# Altium PCB Board.PcbDoc
Units mil, origin at the board's own origin, x right, y up, seen from the top; angles counter-clockwise.
Board outline 2102.46 x 1840.52 mil, 4 copper layers (Top Layer, Layer 1, Layer 2, Bottom Layer), stack 22.441 mil thick; 45 components, 44 nets, 184 pads, 76 vias.
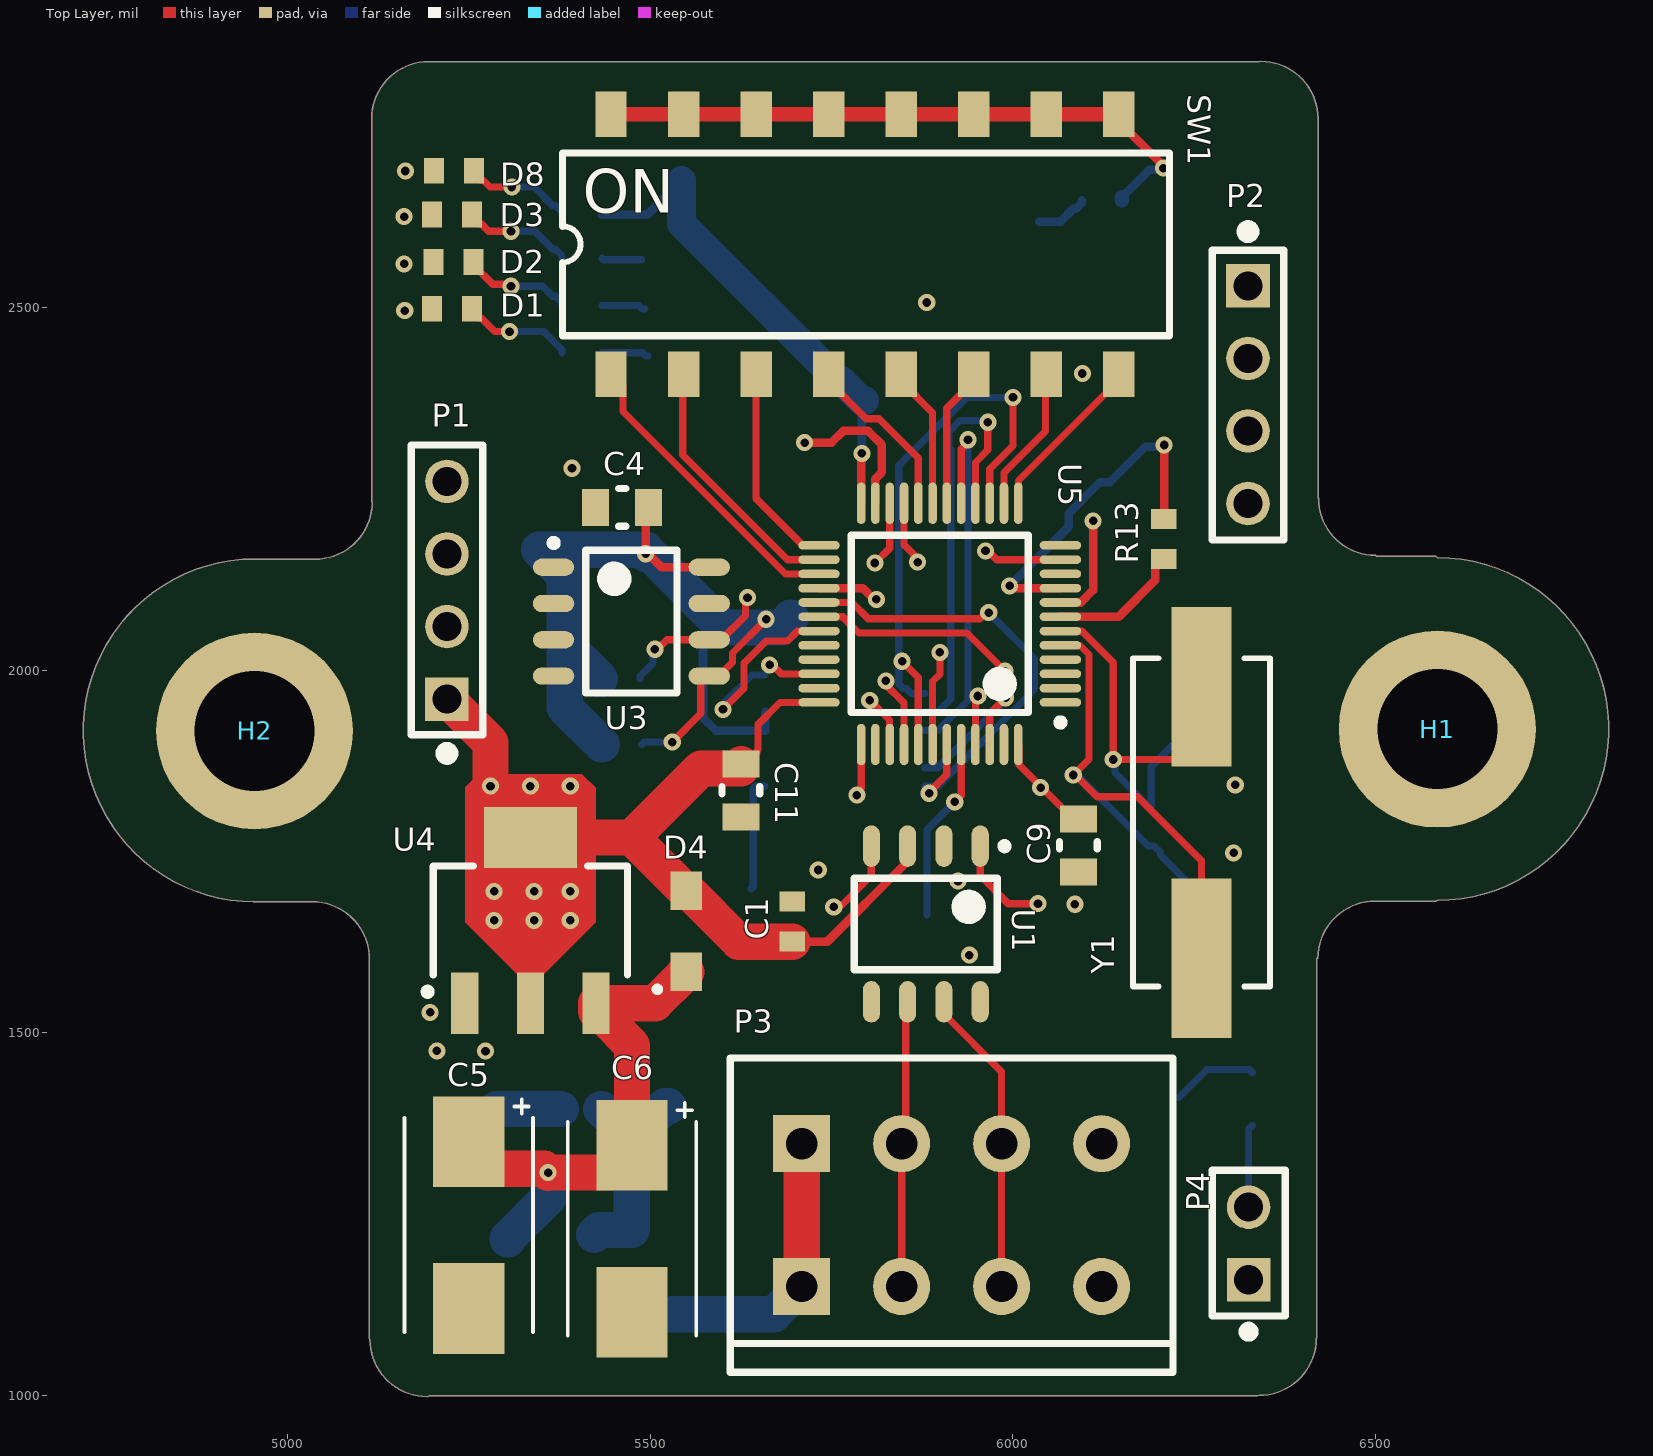
[diagram p0: Top Layer view]
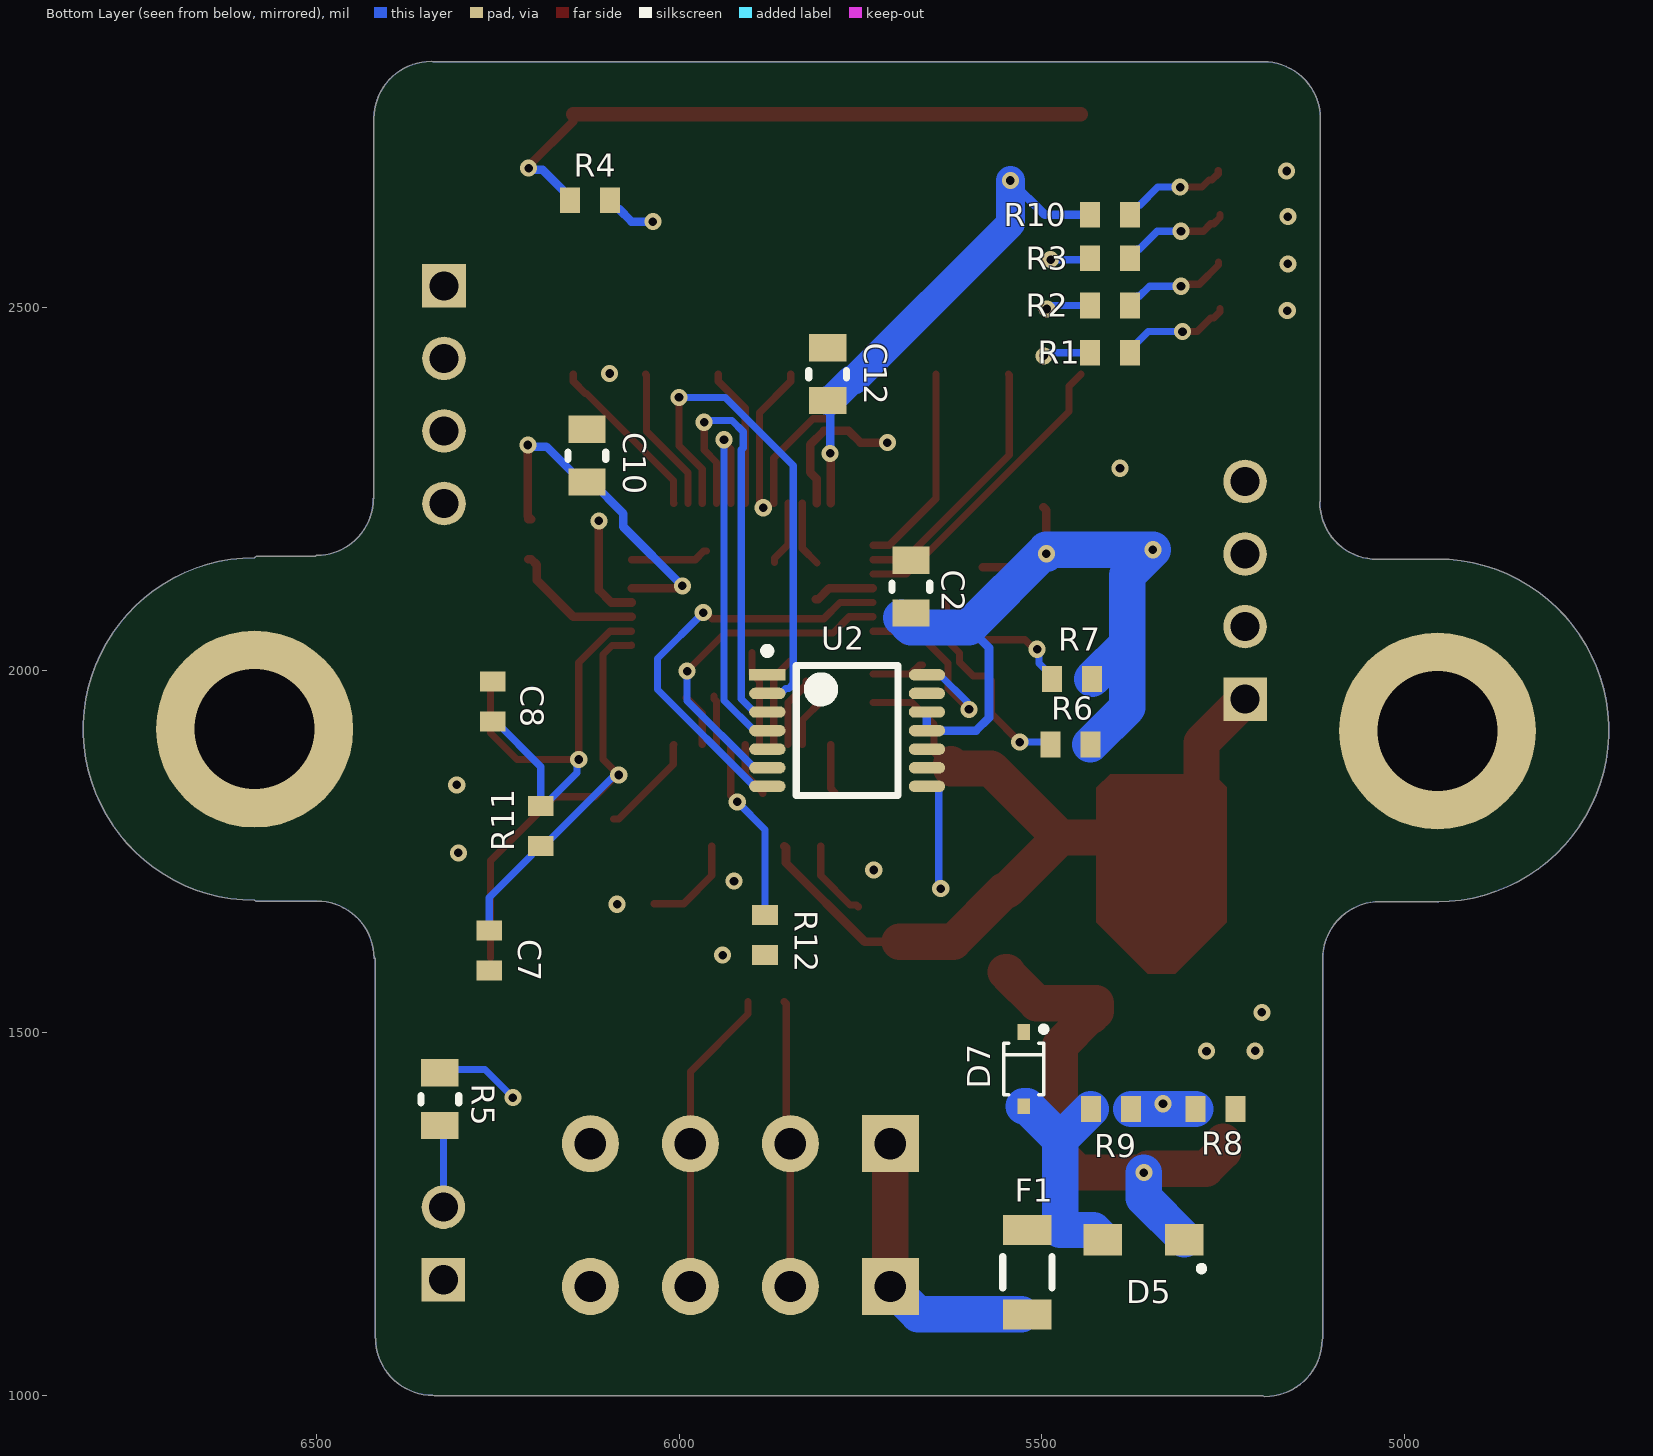
[diagram p1: Bottom Layer view, seen from below]
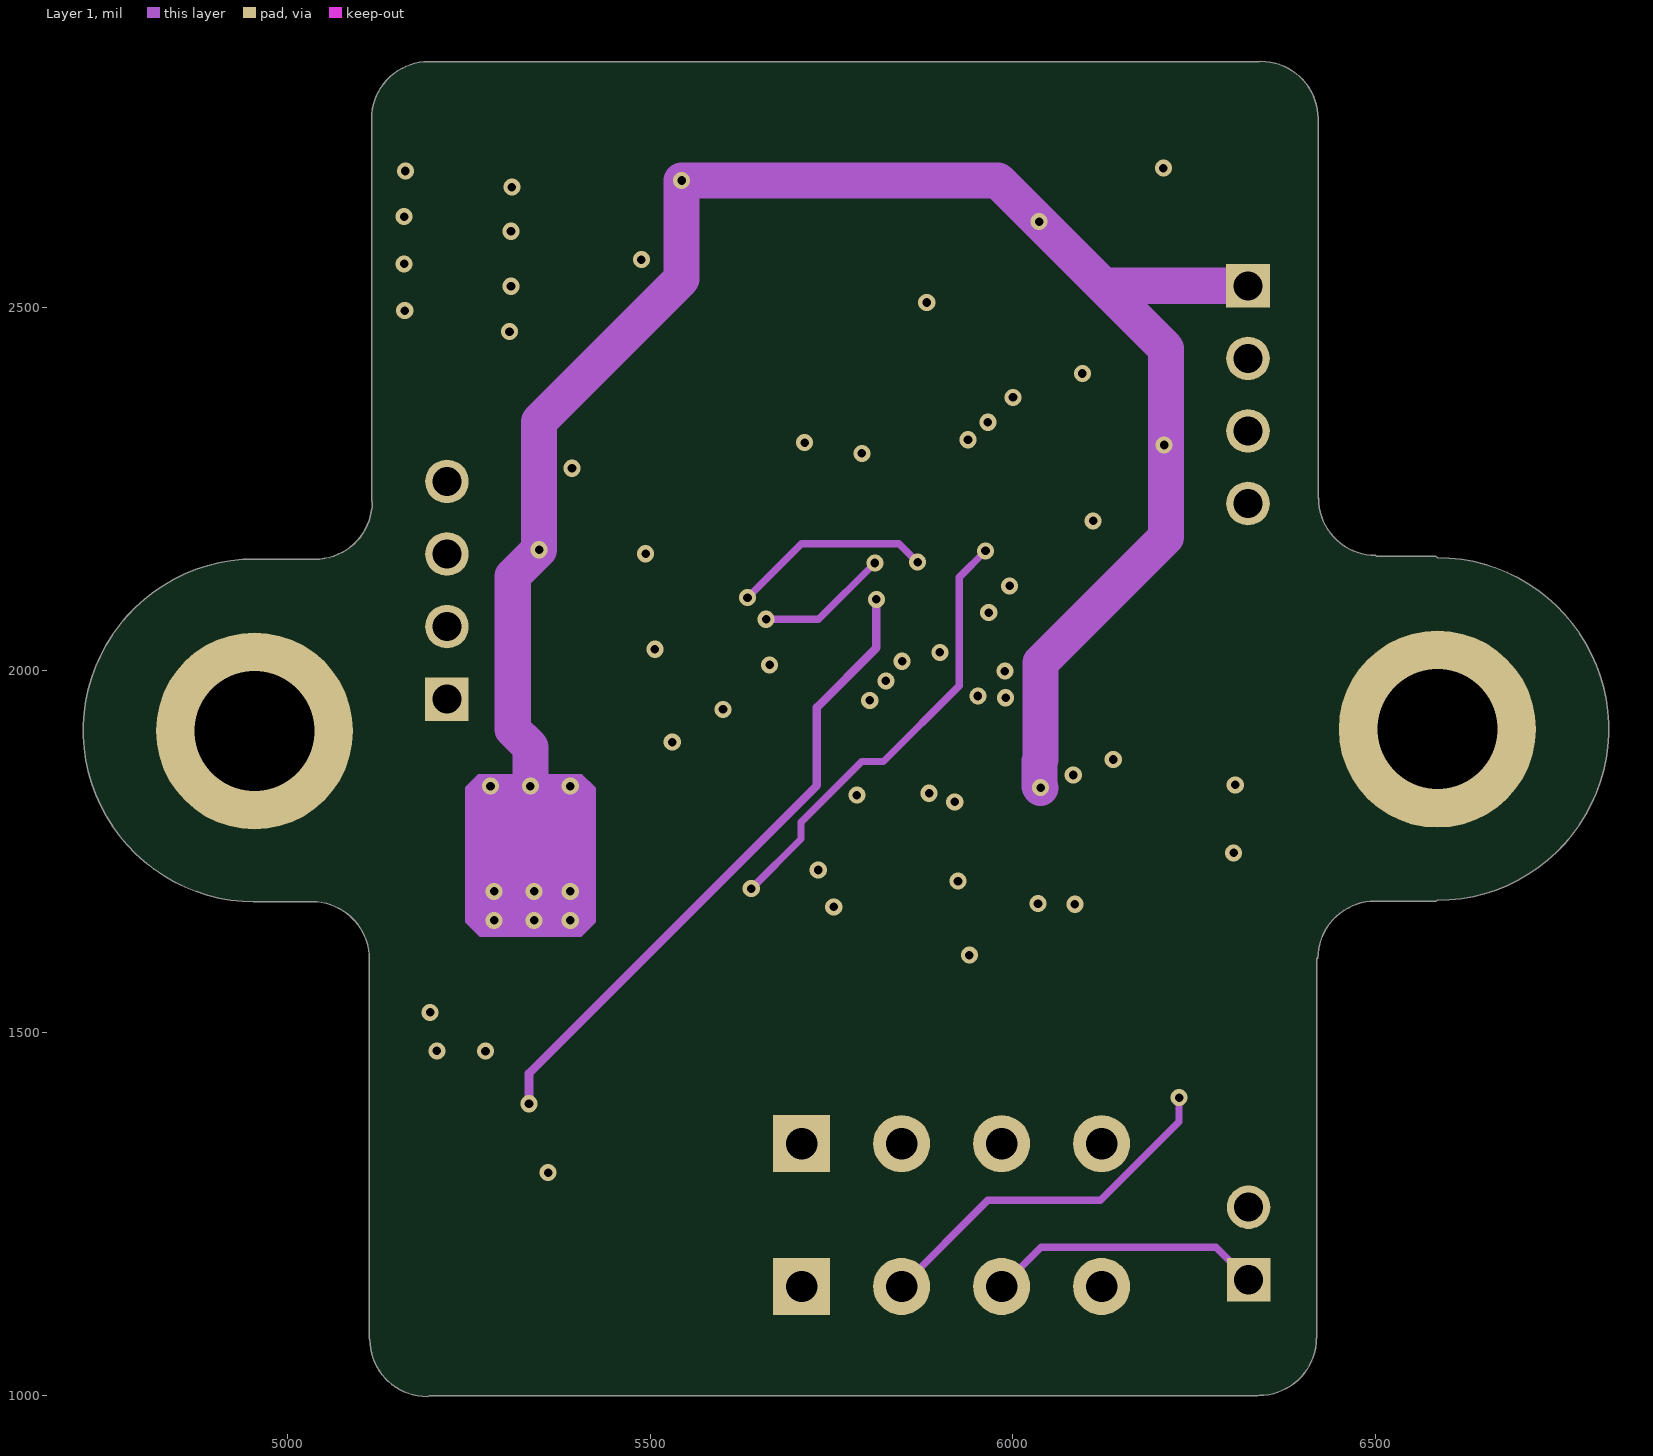
[diagram p2: Layer 1]
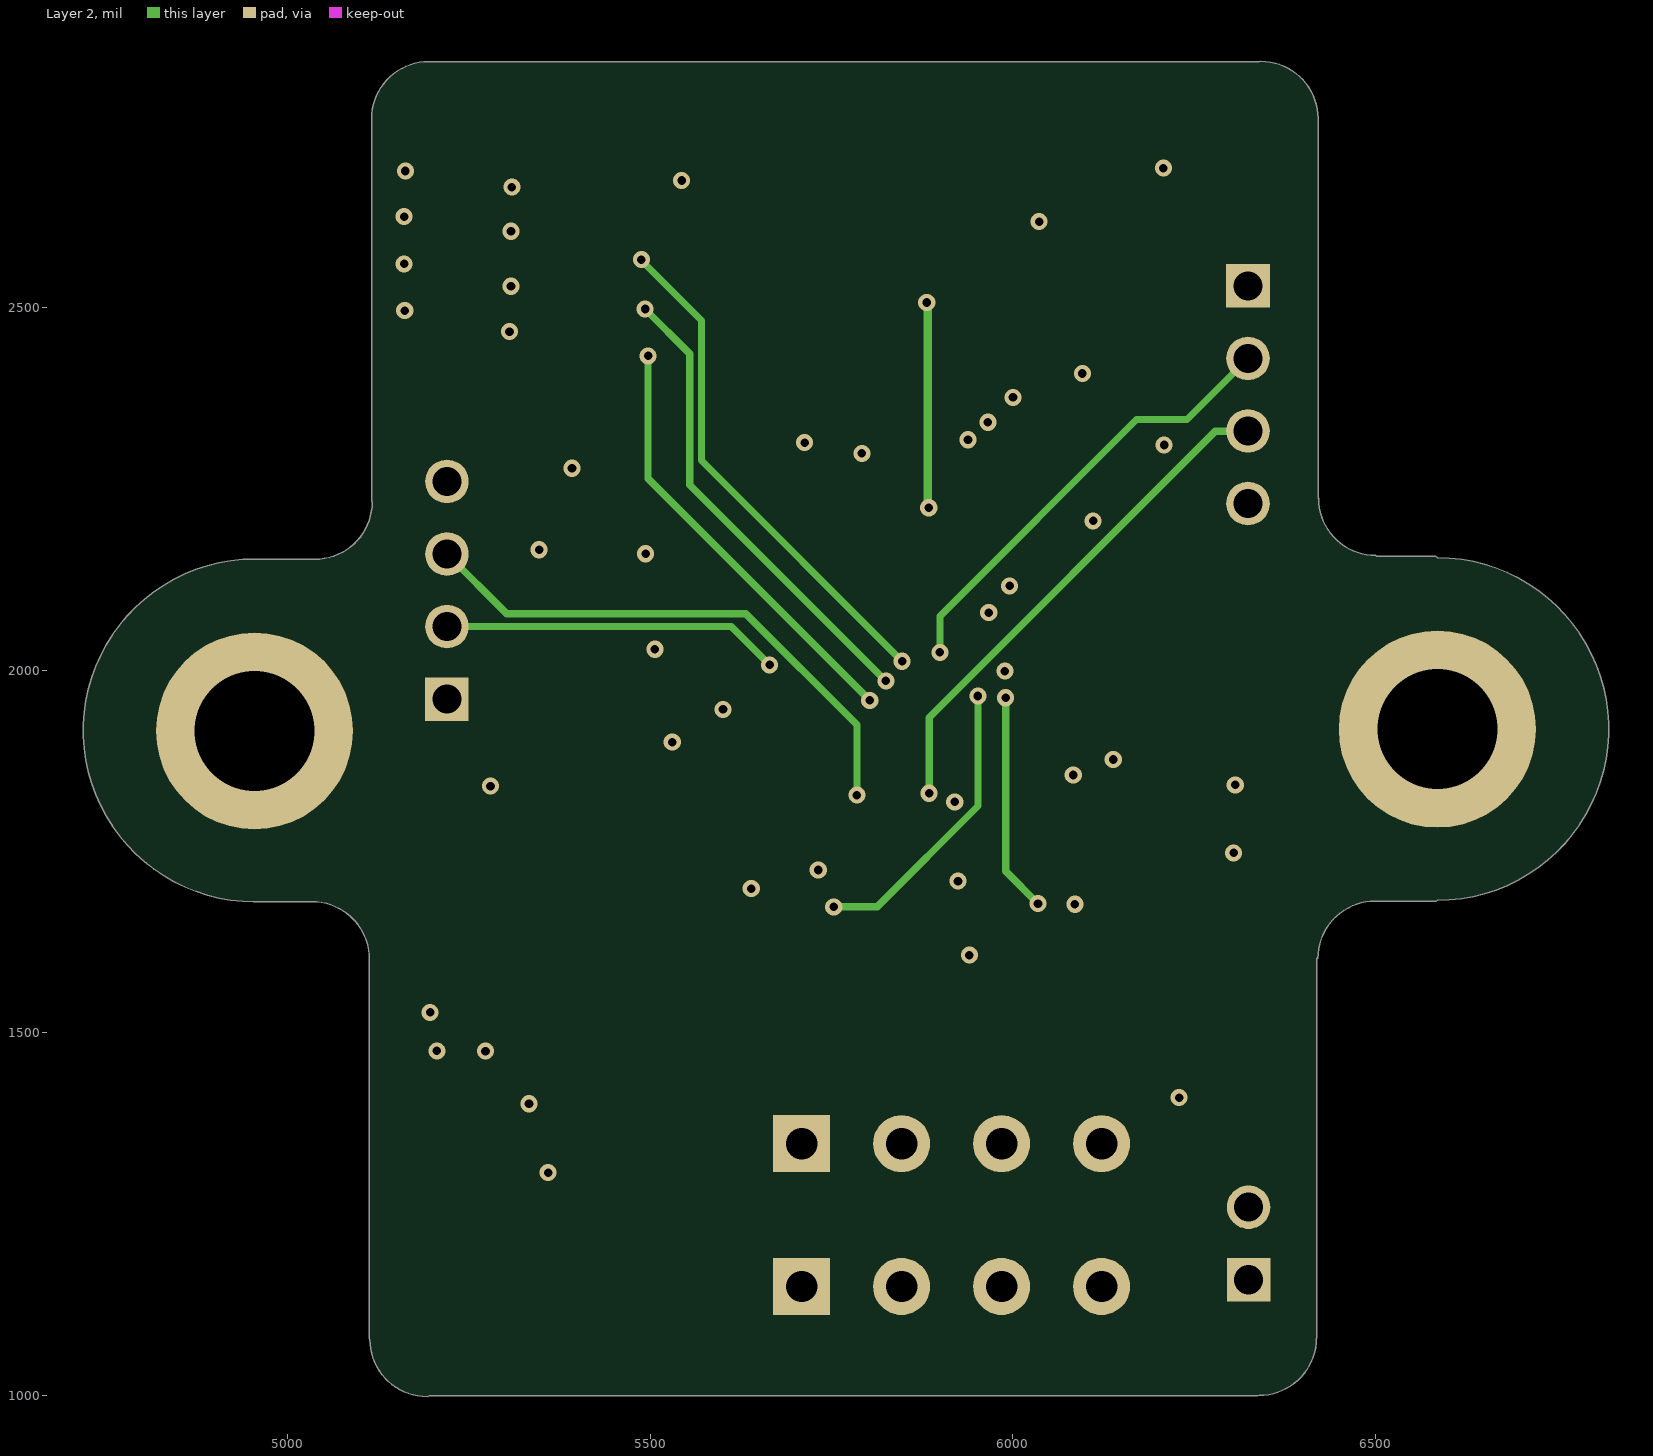
[diagram p3: Layer 2]

## Layer stack, top to bottom
Top Solder: solder mask 0.3937, Solder Resist, Dk 3.5
Top Layer: signal copper 1.4173
Dielectric 2: prepreg 2.7953, PP-006, Dk 4.1
Layer 1: signal copper 0.7087
Dielectric 1: dielectric 12.5984, FR-4, Dk 4.8
Layer 2: signal copper 0.7087
Dielectric 3: prepreg 2.7953, PP-006, Dk 4.1
Bottom Layer: signal copper 1.4173
Bottom Solder: solder mask 0.3937, Solder Resist, Dk 3.5

## Board outline
5034.15,1680.7 cw(c5034.15,1601.96) 5112.89,1601.96 5113.04,1602.04 5113.04,1078.41 5113.75,1077.28 ccw(c5192.49,1077.28) 5192.49,998.54 5195.7,1000 6337.44,1000 6339.61,1000.31 ccw(c6339.61,1079.05) 6418.35,1079.05 6419.21,1078.82 6419.21,1602.44 6420.55,1602.72 cw(c6499.29,1602.72) 6499.29,1681.46 6502.06,1681.59 6583.79,1681.59 6585.18,1682.53 ccw(c6585.18,1918.75) 6585.18,2154.97 6582.66,2157.12 6500.93,2157.12 6500.24,2158.09 cw(c6500.24,2236.83) 6421.5,2236.83 6421.1,2236.5 6421.1,2760.12 6420.68,2760.32 ccw(c6341.94,2760.32) 6341.94,2839.06 6339.45,2838.66 5197.71,2838.66 5194.85,2838.65 ccw(c5194.85,2759.91) 5116.11,2759.91 5116.53,2755.49 5116.53,2231.87 5116.92,2231.51 cw(c5038.18,2231.51) 5038.18,2152.77 5037.56,2153.05 4955.82,2153.05 4954.87,2153.03 ccw(c4954.87,1916.81) 4954.87,1680.59 4953.24,1680.93

## Design rules (kind name [scope] priority, off if disabled: settings)
BoardOutlineClearance [All] p1: gap=15.75 ignorepadtopadclearanceinfootprint=FALSE except(0: Arc-SplitContinuation Track-SplitContinuation SMDPad-SplitContinuation THPad-SplitContinuation Via-SplitContinuation Fill-SplitContinuation Poly-SplitContinuation Region-SplitContinuation Text-SplitContinuation)
Clearance [All] p1: gap=10 ignorepadtopadclearanceinfootprint=FALSE except(0: Arc-Hole Track-Hole SMDPad-Hole THPad-Hole Via-Hole Fill-Hole Poly-Hole Region-Hole Text-Hole; 5.91: Arc-Arc Arc-Track Arc-SMDPad Track-Track Track-SMDPad SMDPad-SMDPad; 9.84: Arc-THPad Arc-Via Track-THPad Track-Via SMDPad-THPad SMDPad-Via THPad-THPad THPad-Via Via-Via)
PolygonConnect [All] p1: connectstyle=Relief reliefconductorwidth=10 reliefentries=4 polygonreliefangle="90 Angle" airgapwidth=10
RoutingVias [All] p1: holewidth=28 width=50 viastyle="Through Hole" minholewidth=28 minwidth=50 maxholewidth=28 maxwidth=50
SolderMaskExpansion [All] p1: expansion=4 istentingtop=FALSE
Width [All] p1: maxlimit=3937.01 minlimit=7.87 preferedwidth=10 minimp=50.000000 maximp=50.000000 favimp=50.000000
30 further rules are at their usual default settings.

## Classes and differential pairs
component class Power: C5 C6 D4 D5 D7 D8 F1 R8 R9 R10 U4
component class MCU: C7 C8 C9 C10 C11 C12 H1 H2 R11 R12 R13 U5 Y1
component class IO: C1 D1 D2 D3 P1 P2 P3 P4 R1 R2 R3 R4 R5 SW1 U1
component class Encoder: C2 C4 R6 R7 U2 U3

## Components (designator, comment, footprint, x,y, rotation, side; value= is the part's Value field where it differs from the comment)
C1 "cap_single_np" chip_0603 5696.02,1653.21 r270 top
C2 "cap_single_np" chip_0805 5680.55,2114.93 r90 bottom
C4 "cap_single_np" chip_0805 5461.35,2224.34 r180 top
C5 "cap_single_p" chip_2917_AVX_TAJD 5250,1235 r270 top
C6 "cap_single_p" chip_2917_AVX_TAJD 5475,1230 r270 top
C7 "cap_single_np" chip_0603 6261.83,1613.42 r270 bottom
C8 "cap_single_np" chip_0603 6256.83,1956.58 r90 bottom
C9 "cap_single_np" chip_0805 6090.31,1758.31 r270 top
C10 "cap_single_np" chip_0805 6127.21,2295.51 r90 bottom
C11 "cap_single_np" chip_0805 5625.26,1834.09 r270 top
C12 "cap_single_np" chip_0805 5795.26,2407.95 r90 bottom
D1 "diode_4" chip_0603 5226.84,2498 r0 top
D2 "diode_4" chip_0603 5228.92,2562.42 r0 top
D3 "diode_4" chip_0603 5226.84,2627.89 r0 top
D4 "diode_2" sod123_0 5550,1640 r90 top
D5 "diode_2" sod123_0 5360,1215 r0 bottom
D7 "diode_5" sod323_0 5525,1450 r270 bottom
D8 "diode_4" chip_0603 5229.42,2688.16 r0 top
F1 "PTC_0" chip_1206 5520,1170 r270 bottom
H1 "mounting_hole_0" #8-32_SOCKET_HEAD 6585.23,1918.69 r0 top
H2 "mounting_hole_0" #8-32_SOCKET_HEAD 4954.69,1916.07 r0 top
P1 "conn-4x1_0" HDDR_4x1_0 5220,1960 r90 top
P2 "conn-4x1_0" HDDR_4x1_0 6324.16,2529.62 r270 top
P3 "conn-4x1_0" TERM_3.50MM_4x1_0 5708.94,1347.18 r0 top
P4 "conn-2x1_0" hddr_2x1_0 6325,1210 r90 top
R1 "res_single" chip_0603 5406,2437.53 r180 bottom
R2 "res_single" chip_0603 5406,2502.53 r180 bottom
R3 "res_single" chip_0603 5406,2567.53 r180 bottom
R4 "res_single" chip_0603 6122.68,2647.63 r180 bottom
R5 "res_single" chip_0805 6330,1408.58 r90 bottom
R6 "res_single" chip_0603 5460.79,1897.36 r0 bottom
R7 "res_single" chip_0603 5458.53,1987.58 r0 bottom
R8 "res_single" chip_0603 5260.77,1394.84 r0 bottom
R9 "res_single" chip_0603 5405,1395 r0 bottom
R10 "res_single" chip_0603 5406,2627.53 r180 bottom
R11 "res_single" chip_0603 6190.73,1785.09 r90 bottom
R12 "res_single" chip_0603 5881.71,1634.93 r270 bottom
R13 "res_single" chip_0603 6208.22,2180.58 r90 top
SW1 "DIP_SW_8" A6S-8104-H 5446.12,2411.74 r90 top
U1 "SN65HVD232" SO-8 5880,1650 r270 top
U2 "AS5147P-HTSM" TSSOP-14_0 5768.51,1916.57 r180 bottom
U3 "24AA01" SO-8 5474.24,2066.76 r0 top
U4 "LM1117" sot-223-4 5335,1655 r90 top
U5 "STM32F103C8" LQFP48_0 5899.21,2063.66 r180 top
Y1 "osc_xtal_2p_0" ABLS_AT49_OSC 6260,1790 r270 top

## Footprints (in the part's own frame and the unit in brackets; to place one, negate y for a bottom-side part, rotate by r counter-clockwise, add the part's x,y. Pads: shape width x height; smd on the part's side, far side on the other; paste and mask are expansions set on the pad)
#8-32_SOCKET_HEAD [mm] "Mounting hole for #8-32 socket head cap screw"
  round 6.9 hole 4.2: 0(0,0)
A6S-8104-H [mm]
  rect 1.6x1.1 smd: 1(-0.1,0) 2(-0.1,-2.54) 3(-0.1,-5.08) 4(-0.1,-7.62) 5(-0.1,-10.16) 6(-0.1,-12.7) 7(-0.1,-15.24) 8(-0.1,-17.78) 9(9,-17.78) 10(9,-15.24) 11(9,-12.7) 12(9,-10.16) 13(9,-7.62) 14(9,-5.08) 15(9,-2.54) 16(9,0)
  silkscreen extent 1.25,-19.55 7.65,1.7, body extent -0.45,-19.53 9.35,1.73, height 4.4
ABLS_AT49_OSC [mil] "ABLS Crystal Oscillator"
  rect 220x83 smd: 1(-187.01,0) 2(186.99,0)
  silkscreen extent -226,-94 226,94, body extent -224,-94 224,94, height 157
chip_0603 [mm]
  rect 0.7x0.9 smd: 1(-0.7,0) 2(0.7,0)
  body extent -0.85,-0.45 0.85,0.45, height 0.6
chip_0805 [mm]
  rect 0.95x1.3 smd: 1(-0.925,0) 2(0.925,0)
  silkscreen extent -0.13,-0.66 0.13,0.66, body extent -1.05,-0.65 1.05,0.65, height 0.6
chip_1206 [mm]
  rect 1.05x1.7 smd: 1(-1.475,0) 2(1.475,0)
  silkscreen extent -0.55,-0.86 0.55,0.86, body extent -1.65,-0.85 1.65,0.85, height 0.6
chip_2917_AVX_TAJD [mil] "2917 footprint for AVX TAJD"
  rect 125x98.43 smd: 1(-115,0) 2(115,0)
  silkscreen extent -173,-89 148,89, body extent -147,-88 147,89, height 124
hddr_2x1_0 [mil] "0.1\" Header 2x1"
  rect 60x60 hole 40: 1(-50.39,0)
  round 60 hole 40: 2(49.61,0)
  silkscreen extent -128,-50 100,50, body extent -100,-50 100,50, height 336
HDDR_4x1_0 [mil]
  rect 60x60 hole 40: 1(0,0)
  round 60 hole 40: 2(100,0) 3(200,0) 4(300,0)
  silkscreen extent -83,-49 350,49, body extent -50,-50 350,50, height 336
LQFP48_0 [mm] "LQFP48, 7.00x7.00mm, 0.50mm"
  oval 1.45x0.3 smd: 1(-4.225,2.75) 2(-4.225,2.25) 3(-4.225,1.75) 4(-4.225,1.25) 5(-4.225,0.75) 6(-4.225,0.25) 7(-4.225,-0.25) 8(-4.225,-0.75) 9(-4.225,-1.25) 10(-4.225,-1.75) 11(-4.225,-2.25) 12(-4.225,-2.75) 25(4.225,-2.75) 26(4.225,-2.25) 27(4.225,-1.75) 28(4.225,-1.25) 29(4.225,-0.75) 30(4.225,-0.25) 31(4.225,0.25) 32(4.225,0.75) 33(4.225,1.25) 34(4.225,1.75) 35(4.225,2.25) 36(4.225,2.75)
  oval 0.3x1.45 smd: 13(-2.75,-4.225) 14(-2.25,-4.225) 15(-1.75,-4.225) 16(-1.25,-4.225) 17(-0.75,-4.225) 18(-0.25,-4.225) 19(0.25,-4.225) 20(0.75,-4.225) 21(1.25,-4.225) 22(1.75,-4.225) 23(2.25,-4.225) 24(2.75,-4.225) 37(2.75,4.225) 38(2.25,4.225) 39(1.75,4.225) 40(1.25,4.225) 41(0.75,4.225) 42(0.25,4.225) 43(-0.25,4.225) 44(-0.75,4.225) 45(-1.25,4.225) 46(-1.75,4.225) 47(-2.25,4.225) 48(-2.75,4.225)
  silkscreen extent -4.35,-3.1 3.1,3.57, body extent -3.5,-3.5 3.5,3.5, height 1.6
SO-8 [mm] "SO-8 Package"
  oval 1.45x0.6 smd: 1(-2.725,1.905) 2(-2.725,0.635) 3(-2.725,-0.635) 4(-2.725,-1.905) 5(2.725,-1.905) 6(2.725,-0.635) 7(2.725,0.635) 8(2.725,1.905)
  silkscreen extent -2.85,-2.5 1.6,2.88, body extent -3.08,-2.5 3.08,2.5, height 2
sod123_0 [mm] "SOD123, 1.65mm x 2.70mm"
  rect 1.35x1.1 smd: 1(-1.425,0) 2(1.425,0)
  silkscreen extent -2.13,0.92 -1.93,1.12, body extent -1.45,-0.9 1.45,0.9, height 1
sod323_0 [mm] "SOD-323, 1.25mm x 1.7mm"
  rect 0.55x0.45 smd: 1(-1.3,0) 2(1.3,0)
  silkscreen extent -1.5,-0.7 0.9,0.8, body extent -0.9,-0.67 0.9,0.67, height 1
sot-223-4 [mm]
  rect 2.15x0.95 smd: 1(-2.9,2.3) 2(-2.9,0) 3(-2.9,-2.3)
  rect 2.15x3.25 smd: 4(2.9,0)
  silkscreen extent -2.62,-3.4 1.9,3.72, body extent -1.9,-3.4 1.9,3.4, height 1.1
TERM_3.50MM_4x1_0 [mm]
  rect 2x2 hole 1.1: 1(0,-5) 1(0,0)
  round 2 hole 1.1: 2(3.5,-5) 2(3.5,0) 3(7,-5) 3(7,0) 4(10.5,-5) 4(10.5,0)
  silkscreen extent -2.5,-8 13,3, body extent -2.5,-8 13,3, height 8.98
TSSOP-14_0 [mil]
  rect 50x15.75 smd mask+1.97: 1(-110,76.8)
  oval 50x15.75 smd mask+1.97: 2(-110,51.2) 3(-110,25.6) 4(-110,0) 5(-110,-25.6) 6(-110,-51.2) 7(-110,-76.8) 8(110,-76.8) 9(110,-51.2) 10(110,-25.6) 11(110,0) 12(110,25.6) 13(110,51.2) 14(110,76.8)
  Top Layer region: -28,66.8
  silkscreen extent -115,-90 70,115, body extent -126,-87 127,88, height 44

## Part data
C1: library part CAP-00477, "CAP, 0.1uF, ±10%, 100V, X7R, 0603", Capacitance=0.1uF, Manufacturer=Murata, Manufacturer PN=GRM188R72A104KA35D, Tolerance=±10%, Voltage Rating=100V, Part Number=CAP-00477, Type=X7R
C2 C4 C9 C10 C11 C12: library part CAP-00073, "CAP, 0.10uF, 10%, 100V, X7R, 0805", Capacitance=0.10uF, Manufacturer=Murata, Manufacturer PN=GRM21BR72A104KAC4L, Tolerance=10%, Voltage Rating=100V, Part Number=CAP-00073, Type=X7R
C5 C6: library part CAP-00550, "CAP, 100uF, ±10%, 16V, Tantalum, 2917", Capacitance=100uF, Manufacturer=AVX, Manufacturer PN=TAJD107K016RNJ, Tolerance=±10%, Voltage Rating=16V, Cost=$0.94, Part Number=CAP-00550, Type=Tantalum
C7 C8: library part CAP-00417, "CAP, 18pF, ±1%, 50V, C0G, 0603", Capacitance=18pF, Manufacturer=Murata, Manufacturer PN=GRM1885C1H180FA01J, Tolerance=±1%, Voltage Rating=50V, Part Number=CAP-00417, Type=C0G
D1 D2 D3: library part DIO-00049, "LED, Blue, 0603, Low current, HELI2 Series", Current Rating=30mA, Forward Voltage=2.65V, Manufacturer=Kingbright, Manufacturer PN=APT1608LVBC/D, Power Rating=120mW, Reverse Breakdown Voltage=5V, Cost=0.58, Part Number=DIO-00049, Type=LED
D4 D5: library part DIO-00001, "Dio Shtky, 1A, 0.55V, 40V, SOD-123", Current Rating=1A, Forward Voltage=550mV, Manufacturer="ON Semi", Manufacturer PN=MBR140SFT1G, Reverse Breakdown Voltage=40V, Part Number=DIO-00001, Type=Schottky
D7: library part DIO-00037, "TVS, 5V, 500W", Manufacturer=ST, Manufacturer PN=ESDA8V2-1J, Power Rating=500W, Reverse Breakdown Voltage=5V, Part Number=DIO-00037, Type=TVS
D8: library part DIO-00050, "LED, Green, 0603, Low current, HELI2 Series", Current Rating=30mA, Forward Voltage=2.65V, Manufacturer=Kingbright, Manufacturer PN=APT1608LZGCK, Power Rating=120mW, Reverse Breakdown Voltage=5V, Cost=0.58, Part Number=DIO-00050, Type=LED
F1: library part MISC-00008, "PTC Resettable fuse, 6V, 500mA, 1206", Manufacturer=Eaton, Manufacturer PN=PTS12066V050, Cost=0.3, Part Number=MISC-00008
H1 H2: library part MISC-00027, "#8-32 Mounting Hole for Socket Head Cap Screw", Part Number=MISC-00027
P1 P2: library part CONN-00029, "Header 4x1, 0.1\"", Levels=1, Part Number=CONN-00029, Positions per level=4, Type=Header
P3: library part CONN-00024, "Term Blk, 4 Pos, 16A, 3.5mm Pitch", Current=16, Manufacturer="Phoenix Contact", Manufacturer PN=1861959, Cost=1.67, Levels=1, Part Number=CONN-00024, Positions per level=4, Type="Terminal Block"
P4: library part CONN-00055, "Header, 2x1, 0.1\"", Manufacturer=Samtec, Manufacturer PN=TSW-102-07-F-S, Cost=0.2, Levels=1, Part Number=CONN-00055, Positions per level=2, Type=Header
R1 R2 R3 R10: library part RES-00221, "RES SMD 330 OHM 1% 1/4W 0603", Manufacturer=Panasonic, Manufacturer PN=ERJ-PA3F3300V, Power Rating=0.25W, Resistance=330, Tolerance=1%, Part Number=RES-00221
R4: library part RES-00188, "RES SMD 150 OHM 1% 1/4W 0603", Manufacturer=Panasonic, Manufacturer PN=ERJ-PA3F1500V, Power Rating=0.25W, Resistance=150, Tolerance=1%, Part Number=RES-00188
R5: library part RES-00183, "RES SMD 120 OHM 1% 1/8W 0805", Manufacturer="Rohm Semiconductor", Manufacturer PN=KTR10EZPF1200, Power Rating=0.125W, Resistance=120, Tolerance=1%, Part Number=RES-00183
R6 R7 R8: library part RES-00365, "RES SMD 2.2K OHM 1% 1/4W 0603", Manufacturer=Panasonic, Manufacturer PN=ERJ-PA3F2201V, Power Rating=0.25W, Resistance=2.2k, Tolerance=1%, Part Number=RES-00365
R9: library part RES-00360, "RES SMD 1K OHM 1% 1/4W 0603", Manufacturer=Panasonic, Manufacturer PN=ERJ-PA3F1001V, Power Rating=0.25W, Resistance=1k, Tolerance=1%, Part Number=RES-00360
R11: library part RES-00362, "RES SMD 1M OHM 1% 1/4W 0603", Manufacturer=Panasonic, Manufacturer PN=ERJ-PA3F1004V, Power Rating=0.25W, Resistance=1M, Tolerance=1%, Part Number=RES-00362
R12 R13: library part RES-00301, "RES SMD 100K OHM 1% 1/4W 0603", Manufacturer=Panasonic, Manufacturer PN=ERJ-PA3F1003V, Power Rating=0.25W, Resistance=100k, Tolerance=1%, Part Number=RES-00301
SW1: library part MISC-00045, "DIP Switch, 8 Switches, SMD, 25mA, 24V", Manufacturer=Omron, Manufacturer PN=A6S-8104-H, Cost=2.85, Part Number=MISC-00045
U1: library part IFACE-00008, "CANbus Transceiver, Single channel, SN65HVD232", Manufacturer=TI, Manufacturer PN=SN65HVD232DR, Cost=2.01, Part Number=IFACE-00008
U2: library part MISC-00046, "IC, 14-bit On-Axis Magnetic Rotary Position Sensor, Incremental, TSSOP-14", Manufacturer=AMS, Cost=12.23, Manufacturer PN=AS5147P-HTSM, Part Number=MISC-00046
U3: library part LOGIC-00028, "EEPROM, 1K-bit, I2C, 400kHz, 24AA01, 8-SOIC", Manufacturer=Microchip, Manufacturer PN=24AA01-I/SN, Cost=$0.20, Part Number=LOGIC-00028
U4: library part PWREG-00018, "REG, Linear, Fixed 3V3, 800mA, SOT-223", Manufacturer=TI, Manufacturer PN=LM1117MPX-3.3/NOPB, Max Current=800mA, Voltage Range In="4.5 - 15V", Voltage Range Out=3.3V, Cost=1.14, Fixed/Adj=Fixed, Part Number=PWREG-00018, Reg Type=Linear
U5: library part UCTRL-00008, "STM32 M3, LQFP-48", Manufacturer=ST, Manufacturer PN=STM32F103C8, Part Number=UCTRL-00008
Y1: library part OSC-00002, "XTAL, 8MHz, 18pF, 20ppm", Frequency=8.000M, Load Capacitance=18pF, Manufacturer=Abracon, Manufacturer PN=ABLS-8.000MHZ-B2-T, Tolerance=20ppm, ESR=80, Part Number=OSC-00002, Stability=50ppm

## Via types
v1: diameter 23.62, hole 11.81, Top Layer to Bottom Layer, 38 vias
v2: diameter 23.62, hole 11.81, Top Layer to Layer 1, 15 vias
v3: diameter 23.62, hole 11.81, Top Layer to Layer 2, 13 vias
v4: diameter 23.62, hole 11.81, Layer 1 to Bottom Layer, 7 vias
v5: diameter 23.62, hole 11.81, Layer 2 to Bottom Layer, 3 vias

## Nets (pads, with @x,y where several pads share a name; then routed paths per layer and width w, separated by ;. In a path a pad name is that pad's centre, name@x,y a point inside that pad or via, vN(x,y) a via of type N, cw(c..) or ccw(c..) an arc to the next point about the centre after c; other vN are vias at no path point)
+3.3: C1.2 C2.1 C4.1 C9.1 C10.1 C11.1 C12.1 D4.2 P1.1 P2.1 R4.2 R6.1 R7.1 R10.1 R13.2 U1.3 U2.11 U2.12 U3.8 U4.2 U4.4 U5.9 U5.24 U5.36 U5.48 | length 6318.9
  Top Layer w10: C11.1 5632.15,1870.51 5646.91,1885.28 5646.91,1888.23 5648.57,1889.89 5648.57,1924.81 5679.15,1955.39 U5.36 ; U5.48 6008.23,1896.57 6008.23,1869.92 6083.42,1794.73 C9.1
  Top Layer w11.81: C4.1 5493.89,2220.45 v1(5493.89,2160.43) 5497.08,2160.43 5515.75,2141.76 U3.8 ; C1.2 5744.13,1625.65 5852.74,1734.27 5852.74,1755.02 U1.3 ; U5.24 5790.94,2297.77 v1(5791.95,2298.78) ; v1(5995.5,2116.05) 5998.69,2116.05 6001.87,2112.87 U5.9 ; R13.2 6204.28,2208.14 6208.49,2212.34 v1(6208.49,2310.3)
  Top Layer w50: P1.1 5280,1900 v3(5280,1840) ; U4.4 5475.16,1769.17 ; C11.1 5625.26,1864.8 5624.66,1864.21 5570.2,1864.21 5475.16,1769.17 ; C1.2 5622.22,1625.65 5551.77,1696.1 D4.2 5548.23,1696.1 5475.16,1769.17
  Layer 1 w50: v2(5335,1840) 5335,1893.79 5310.48,1918.31 5310.48,2129.45 v4(5346.92,2165.9) 5346.92,2342.49 5543.36,2538.94 v4(5543.36,2674.9) 5979.55,2674.9 v4(6036.24,2618.21) 6124.83,2529.62 ; v2(6038.26,1837.94) 6036.71,1839.49 6036.71,1874.7 6038.26,1876.25 6038.26,2010.06 6211.2,2183 6211.2,2310.3 6211.2,2443.25 6124.83,2529.62 ; P2.1 6124.83,2529.62
  Bottom Layer w11.81: R10.1 5495.99,2627.53 v4(5543.36,2674.9) ; 5601.01,2058.77 5572.89,2030.65 5572.89,1934.4 5590.72,1916.57 U2.11 U2.12 ; C2.1 C2.1@5687.44,2078.51 ; v1(5791.95,2298.78) 5791.95,2368.23 C12.1 ; v1(5995.5,2116.05) 6076.95,2197.51 6076.95,2215.72 6120.32,2259.09 C10.1 6134.1,2259.09 6183.05,2308.05 6206.23,2308.05 v1(6208.49,2310.3) ; v4(6036.24,2618.21) 6036.32,2618.28 6065.77,2618.28 6083.31,2635.82 6087.24,2635.82 6095.12,2643.69 R4.2
  Bottom Layer w40: v4(5543.36,2674.9) 5543.36,2615.34 5758.94,2399.76 5762.74,2399.76 5790.97,2371.53 C12.1
  Bottom Layer w50: R7.1 5382.17,2036.38 5382.17,2040.2 ; R6.1 5382.17,1948.43 5382.17,2040.2 ; v1(5493.89,2160.43) v1@5493.89,2165.9 ; C2.1@5693.83,2072.11 5680.49,2058.77 5601.01,2058.77 v1@5493.89,2165.9 ; 5382.17,2040.2 5382.17,2130.65 v4(5346.92,2165.9) v1@5493.89,2165.9
  other v2: 5285,1655 5340,1655 5390,1655 5285,1695 5340,1695 5390,1695 5390,1840
+5: F1.2 P3.1 | length 393.2
  Top Layer w50: P3.1@5708.94,1150.33 P3.1@5708.94,1347.18
  Bottom Layer w50: F1.2@5528.46,1111.93 5670.54,1111.93 P3.1@5708.94,1150.33
CAN_H: P3.3 P4.1 U1.7 | length 806.9
  Top Layer w10: U1.7 5905,1525.98 5984.53,1446.45 P3.3@5984.53,1150.33
  Layer 1 w10: P3.3@5984.53,1150.33 6038.74,1204.54 6280.06,1204.54 P4.1
CAN_L: P3.2 R5.2 U1.6 | length 1024.2
  Top Layer w10: P3.2@5846.74,1150.33 5846.74,1347.18 5852.39,1352.84 5852.39,1540.11 U1.6
  Layer 1 w10: P3.2@5846.74,1150.33 5965.54,1269.13 6120.95,1269.13 6229.21,1377.39 v4(6229.21,1410.68)
  Bottom Layer w10: v4(6229.21,1410.68) 6267.8,1449.27 6325.73,1449.27 R5.2
GND: C1.1 C2.2 C4.2 C5.2 C6.2 C7.2 C8.2 C9.2 C10.2 C11.2 C12.2 D1.1 D2.1 D3.1 D7.1 D8.1 H1.0 H2.0 P1.4 P2.4 P3.4 R8.1 R12.2 U1.2 U2.1 U2.5 U2.13 U3.4 U3.7 U4.1 U5.8 U5.23 U5.35 U5.47 | length 636.9
  Top Layer w11.81: v1(5713.04,2313.65) 5750.05,2313.65 5766.11,2329.7 5800.4,2329.7 5819.51,2310.59 5819.51,2272.61 5810.63,2263.73 U5.23 ; U5.8 6093.56,2093.19 6110.58,2110.21 v1(6110.58,2205.63)
  Layer 2 w11.81: v3(5881.36,2506.68) 5882.75,2505.29 5882.75,2225.13 v5(5884.14,2223.74)
  other v1: 5206.08,1475.1 5273.11,1474.68 5196.81,1528.22 5940.07,1607.16 5924.44,1709.13 5731.82,1724.42 5392.3,2278.21 6095.93,2408.79 5161.71,2495.61 5160.98,2559.9 5160.98,2625.16 5162.69,2687.97
NetC5_1: C5.1 C6.1 D4.1 D5.1 U4.3 | length 750.1
  Top Layer w50: C5.1 5250,1336.71 5274.21,1312.5 5354.2,1312.5 v1(5359.45,1307.25) 5359.7,1307.5 5450.79,1307.5 5475,1331.71 C6.1 5475,1482.5 5434,1523.5 5431.85,1523.5 5425.55,1529.8 U4.3 5506.93,1540.83 5546.65,1580.55 5546.65,1582.32 5548.23,1583.9 D4.1
  Bottom Layer w50: D5.1 5303.9,1216.77 5359.45,1272.32 v1(5359.45,1307.25)
NetD1_2: D1.2 R1.2 | length 153.7
  Top Layer w10: D1.2 5254.4,2494.06 5263.18,2485.28 5267.12,2485.28 5285.79,2466.61 v1(5306.22,2466.61)
  Bottom Layer w10: v1(5306.22,2466.61) 5353.3,2466.61 5378.44,2441.46 R1.2
NetD2_2: D2.2 R2.2 | length 151.4
  Top Layer w10: D2.2 5256.48,2558.49 5283.18,2531.79 5305.6,2531.79 v1(5308.21,2529.18)
  Bottom Layer w10: v1(5308.21,2529.18) 5351.78,2529.18 5365.72,2515.24 5369.66,2515.24 5378.44,2506.46 R2.2
NetD3_2: D3.2 R3.2 | length 153.7
  Top Layer w10: D3.2 5254.4,2623.95 5263.18,2615.17 5267.12,2615.17 5277.37,2604.92 v1(5308.21,2604.92)
  Bottom Layer w10: v1(5308.21,2604.92) 5341.05,2604.92 5365.72,2580.24 5369.66,2580.24 5378.44,2571.46 R3.2
NetD5_2: D5.2 D7.2 F1.1 R9.2 | length 317.6
  Bottom Layer w10: D5.2 D5.2@5422.64,1221.54
  Bottom Layer w50: D5.2@5422.64,1221.54 5429.17,1228.07 5474.59,1228.07 5474.59,1352.97 ; R9.2 5474.59,1352.97 ; D7.2 5520.43,1398.82 5474.59,1352.97
NetD8_2: D8.2 R10.2 | length 151.2
  Top Layer w10: D8.2 5256.98,2684.22 5265.76,2675.44 5269.69,2675.44 5279.38,2665.76 v1(5309.45,2665.76)
  Bottom Layer w10: v1(5309.45,2665.76) 5340.21,2665.76 5365.72,2640.24 5369.66,2640.24 5378.44,2631.46 R10.2
NetP1_2: P1.2 U5.34 | length 539.9
  Top Layer w10: v3(5664.75,2007.11) 5668.43,2007.11 5680.78,1994.76 U5.34
  Layer 2 w10: P1.2 5611.85,2060 v3(5664.75,2007.11)
NetP1_3: P1.3 U5.37 | length 831.5
  Top Layer w10: v3(5785.05,1827.68) 5785.05,1831.37 5790.94,1837.26 U5.37
  Layer 2 w10: P1.3 5302.44,2077.56 5631.99,2077.56 5785.05,1924.5 v3(5785.05,1827.68)
NetP2_2: P2.2 U5.42 | length 753.3
  Top Layer w10: U5.42 5889.14,1897.55 5889.14,1984.12 5899.46,1994.43 v3(5899.46,2024.32)
  Layer 2 w10: v3(5899.46,2024.32) 5899.46,2074.37 6170.61,2345.52 6240.07,2345.52 P2.2
NetP2_3: P2.3 U5.43 | length 784.8
  Top Layer w10: v3(5884.63,1830.19) 5884.63,1831.63 5909.05,1856.05 U5.43
  Layer 2 w10: v3(5884.63,1830.19) 5884.63,1934.64 6279.16,2329.16 6323.71,2329.16 P2.3
NetP4_2: P4.2 R5.1 | length 114.6
  Bottom Layer w10: P4.2 6325,1367.16 R5.1
NetR1_1: R1.1 U5.39 | length 739.2
  Top Layer w10: v3(5802.81,1958.27) 5829.97,1931.12 5829.97,1897.67 U5.39
  Layer 2 w10: v5(5497.25,2433) 5497.25,2263.83 v3(5802.81,1958.27)
  Bottom Layer w10: R1.1 5489.03,2437.53 5493.56,2433 v5(5497.25,2433)
NetR2_1: R2.1 U5.40 | length 809.7
  Top Layer w10: v3(5825,1985) 5825,1979.79 5850,1954.79 U5.40
  Layer 2 w10: v5(5493.03,2497.7) 5554.81,2435.91 5554.81,2255.19 v3(5825,1985)
  Bottom Layer w10: R2.1 5484.51,2502.53 5489.34,2497.7 v5(5493.03,2497.7)
NetR3_1: R3.1 U5.41 | length 883
  Top Layer w10: v3(5847.27,2012.23) 5869.68,1989.82 U5.41
  Layer 2 w10: v4@5488.01,2567.04 v4(5488.01,2565.8) 5488.01,2564.56 5570.72,2481.85 5570.72,2288.78 v3(5847.27,2012.23)
  Bottom Layer w10: R3.1 5435.29,2565.8 v4(5488.01,2565.8)
NetR4_1: R4.1 SW1.9 SW1.10 SW1.11 SW1.12 SW1.13 SW1.14 SW1.15 SW1.16 | length 877.6
  Top Layer w11.81: SW1.9 6146.12,2756.23 6207.62,2694.73 v1(6207.62,2691.99)
  Top Layer w20: SW1.16 SW1.15 SW1.14 SW1.13 SW1.12 SW1.11 SW1.10 SW1.9
  Bottom Layer w11.81: R4.1@6150.23,2651.57 6188.4,2689.73 6205.36,2689.73 v1(6207.62,2691.99)
  Bottom Layer w20: R4.1 R4.1@6150.23,2651.57
NetR6_2: R6.2 U3.5 U5.22 | length 550.4
  Top Layer w10: v1(5530.48,1900.71) 5569.79,1940.01 5569.79,1985.47 5576.08,1991.76 U3.5@5581.76,1991.76 ; U3.5 U3.5@5581.76,1991.76 ; v2(5660,2070) 5613.5,2023.5 5613.5,2010.69 5594.57,1991.76 U3.5@5581.76,1991.76 ; v2(5809.85,2147.65) 5830.31,2168.11 U5.22
  Layer 1 w10: v2(5660,2070) 5732.2,2070 v2(5809.85,2147.65)
  Bottom Layer w10: R6.2 5491.69,1900.71 v1(5530.48,1900.71)
NetR7_2: R7.2 U3.6 U5.21 | length 584.5
  Top Layer w10: v1(5506.61,2028.63) 5510.3,2028.63 5523.44,2041.76 U3.6 5598.25,2041.76 5631.66,2075.17 5631.66,2097.27 v2(5634.26,2099.87) ; U5.21 5850,2172.83 5868.67,2154.16 v2(5868.67,2148.74)
  Layer 1 w10: v2(5634.26,2099.87) 5708.69,2174.3 5843.1,2174.3 v2(5868.67,2148.74)
  Bottom Layer w10: R7.2 5486.09,1991.51 5504.01,2009.43 5504.01,2026.02 v1(5506.61,2028.63)
NetR8_2: R8.2 R9.1 U5.28 | length 1070.6
  Top Layer w11.81: U5.28 5793.26,2112.87 5808.67,2097.47 v2(5811.86,2097.47)
  Layer 1 w11.81: v4(5333.07,1402.14) 5333.07,1444.08 5729.99,1841 5729.99,1948.62 5811.86,2030.49 v2(5811.86,2097.47)
  Layer 2 w11.81: v4(5333.07,1402.14) v4@5335.33,1404.4
  Bottom Layer w50: R8.2 5376.5,1394.84 R9.1@5376.65,1395
NetR12_1: R12.1 U5.44 | length 254.3
  Top Layer w10: v1(5920,1818.33) 5928.74,1827.07 U5.44
  Bottom Layer w10: R12.1 5881.71,1780.05 v1(5920,1818.33)
NetR13_1: R13.1 U5.7 | length 188
  Top Layer w11.81: U5.7 6145.94,2073.5 6196.41,2123.97 6196.41,2145.14 6204.28,2153.02 R13.1
NetSW1_1: SW1.1 U5.27 | length 421.2
  Top Layer w10: SW1.1 5462.78,2391.15 5462.78,2356.3 5686.52,2132.56 U5.27
NetSW1_2: SW1.2 U5.26 | length 359.4
  Top Layer w10: SW1.2 5545,2406.68 5545,2296.57 5689.33,2152.24 U5.26
NetSW1_3: SW1.3 U5.25 | length 285.1
  Top Layer w10: SW1.3 5646.12,2236.04 5710.24,2171.93 U5.25
NetSW1_4: SW1.4 U5.20 | length 239.4
  Top Layer w10: SW1.4 5746.12,2397.96 5797.57,2346.52 5815.41,2346.52 5869.68,2292.25 U5.20
NetSW1_5: SW1.5 U5.19 | length 195.7
  Top Layer w10: SW1.5 5846.12,2397.96 5889.37,2354.72 U5.19
NetSW1_6: SW1.6 U5.18 | length 193.2
  Top Layer w10: U5.18 5909.05,2360.89 5946.12,2397.96 SW1.6
NetSW1_7: SW1.7 U5.14 | length 202
  Top Layer w10: U5.14 5987.79,2272.19 6045,2329.39 6045,2406.68 SW1.7
NetSW1_8: SW1.8 U5.13 | length 236.2
  Top Layer w10: U5.13 6007.83,2230.35 6007.83,2261.26 6127.87,2381.31 6129.47,2381.31 6146.12,2397.96 SW1.8
NetU1_1: U1.1 U5.46 | length 512.4
  Top Layer w10: U1.1 5955,1716.78 5993.77,1678.01 v3(6034.69,1678.01) ; U5.46 5968.11,1939.97 v3(5990.08,1961.94)
  Layer 2 w10: v3(5990.08,1961.94) 5990.08,1722.63 v3(6034.69,1678.01)
NetU1_4: U1.4 U5.45 | length 586.7
  Top Layer w10: v3(5753.11,1673.61) 5755.72,1676.22 5764.44,1676.22 5805,1716.78 U1.4 ; U5.45 5948.42,1957.05 5951.92,1960.54 v3(5951.92,1964.23)
  Layer 2 w10: v3(5753.11,1673.61) 5812.97,1673.61 5951.92,1812.56 v3(5951.92,1964.23)
NetU2_2: U2.2 U5.15 | length 698.1
  Top Layer w10: U5.15 5968.11,2277.16 6000.24,2309.29 v1(6000.24,2375.86)
  Bottom Layer w10: U2.2 5859.83,1967.77 5853.01,1974.59 5848.99,1974.59 5842.6,1980.98 5842.6,2282.07 5936.39,2375.86 v1(6000.24,2375.86)
NetU2_3: U2.3 U5.16 | length 593.2
  Top Layer w10: U5.16 5948.42,2286.19 5965.53,2303.3 v1(5965.53,2341.62)
  Bottom Layer w10: U2.3 5896.59,1942.17 5914.41,1959.99 5914.41,2303.55 5911.53,2306.43 5911.53,2328.51 5927.14,2344.12 5963.02,2344.12 v1(5965.53,2341.62)
NetU2_4: U2.4 U5.17 | length 527.6
  Top Layer w10: U5.17 5928.74,2304.34 5938.18,2313.78 v1(5938.18,2317.47)
  Bottom Layer w10: U2.4 5896.59,1916.57 5938.18,1958.16 v1(5938.18,2317.47)
NetU2_6: U2.6 U5.30 | length 476.9
  Top Layer w10: U5.30 5765.69,2073.5 5787.97,2051.22 5820.42,2051.22 5820.67,2050.97 5936.73,2050.97 v1(5989.07,1998.63)
  Bottom Layer w10: U2.6 5896.59,1865.37 5989.07,1957.85 v1(5989.07,1998.63)
NetU2_7: U2.7 U5.29 | length 585.5
  Top Layer w10: U5.29 5778.27,2093.19 5800.64,2070.82 5954.79,2070.82 5963.13,2079.16 v1(5966.81,2079.16)
  Bottom Layer w10: U2.7 5896.59,1839.77 6029.94,1973.12 6029.94,2016.03 v1(5966.81,2079.16)
NetU2_8: U2.8 U5.11 | length 882
  Top Layer w10: v2(5962.32,2164.24) 5966.01,2164.24 5978,2152.24 U5.11
  Layer 1 w10: v4(5639.49,1698.68) 5708.05,1767.24 5708.05,1790.31 5791.84,1874.09 5821.73,1874.09 5926.11,1978.47 5926.11,2128.02 v2(5962.32,2164.24)
  Bottom Layer w10: v4(5639.49,1698.68) 5642.1,1701.28 5642.1,1837.12 5644.75,1839.77 U2.8
NetU2_14: U2.14 U5.31 | length 279.7
  Top Layer w10: v1(5600.45,1945.82) 5629.4,1974.78 5629.4,2009.46 5659.99,2040.05 5689.29,2040.05 5702.71,2053.47 5732.53,2053.47 U5.31
  Bottom Layer w10: v1(5600.45,1945.82) 5603.05,1948.43 5603.05,1956 5640.42,1993.37 U2.14
OSC_IN: C7.1 R11.1 U5.5 Y1.2 | length 875.7
  Top Layer w10: U5.5 6065.9,2033.79 6092.62,2033.79 6105,2021.41 6105,1877.01 v1(6083.37,1855.38) 6086.09,1855.38 6115.94,1825.53 6171.76,1825.53 6260,1737.28 Y1.2
  Bottom Layer w10: v1(6083.37,1855.38) 6085.97,1852.77 6091.55,1852.77 6186.79,1757.53 R11.1 6194.66,1757.53 6203.44,1748.75 6203.44,1744.81 6261.83,1686.42 C7.1
OSC_OUT: C8.1 R11.2 U5.6 Y1.1 | length 659.2
  Top Layer w10: U5.6 6065.9,2053.47 6095.43,2053.47 6138.36,2010.55 v1(6138.36,1876.72) 6223.5,1876.72 6260,1913.22 Y1.1
  Bottom Layer w10: v1(6138.36,1876.72) 6140.97,1874.11 6140.97,1858.47 6186.79,1812.65 R11.2 6190.73,1866.85 6252.9,1929.02 C8.1
pads on no net: U1.5 U1.8 U2.9 U2.10 U3.1 U3.2 U3.3 U5.1 U5.2 U5.3 U5.4 U5.10 U5.12 U5.32 U5.33 U5.38
copper on no net:
  other v1: 6085.57,1677.2 6304.4,1748 6306.55,1841.68

## Polygon pours and split planes (outlines as drawn)
GND on Top Layer "Top Layer-GND" (solid, shelved, pour order 4): 5034.15,1680.7 cw(c5034.15,1601.96) 5112.89,1601.96 5113.04,1602.04 5113.04,1078.41 5113.75,1077.28 ccw(c5192.49,1077.28) 5192.49,998.54 5195.7,1000 6337.44,1000 6339.61,1000.31 ccw(c6339.61,1079.05) 6418.35,1079.05 6419.21,1078.82 6419.21,1602.44 6420.55,1602.72 cw(c6499.29,1602.72) 6499.29,1681.46 6502.06,1681.59 6583.79,1681.59 6585.18,1682.53 ccw(c6585.18,1918.75) 6585.18,2154.97 6582.66,2157.12 6500.93,2157.12 6500.24,2158.09 cw(c6500.24,2236.83) 6421.5,2236.83 6421.1,2236.5 6421.1,2760.12 6420.68,2760.32 ccw(c6341.94,2760.32) 6341.94,2839.06 6339.45,2838.66 5197.71,2838.66 5194.85,2838.65 ccw(c5194.85,2759.91) 5116.11,2759.91 5116.53,2755.49 5116.53,2231.87 5116.92,2231.51 cw(c5038.18,2231.51) 5038.18,2152.77 5037.56,2153.05 4955.82,2153.05 4954.87,2153.03 ccw(c4954.87,1916.81) 4954.87,1680.59 4953.24,1680.93
GND on Bottom Layer "Bottom Layer - GND" (solid, shelved, pour order 5): 5034.15,1680.7 cw(c5034.15,1601.96) 5112.89,1601.96 5113.04,1602.04 5113.04,1078.41 5113.75,1077.28 ccw(c5192.49,1077.28) 5192.49,998.54 5195.7,1000 6337.44,1000 6339.61,1000.31 ccw(c6339.61,1079.05) 6418.35,1079.05 6419.21,1078.82 6419.21,1602.44 6420.55,1602.72 cw(c6499.29,1602.72) 6499.29,1681.46 6502.06,1681.59 6583.79,1681.59 6585.18,1682.53 ccw(c6585.18,1918.75) 6585.18,2154.97 6582.66,2157.12 6500.93,2157.12 6500.24,2158.09 cw(c6500.24,2236.83) 6421.5,2236.83 6421.1,2236.5 6421.1,2760.12 6420.68,2760.32 ccw(c6341.94,2760.32) 6341.94,2839.06 6339.45,2838.66 5197.71,2838.66 5194.85,2838.65 ccw(c5194.85,2759.91) 5116.11,2759.91 5116.53,2755.49 5116.53,2231.87 5116.92,2231.51 cw(c5038.18,2231.51) 5038.18,2152.77 5037.56,2153.05 4955.82,2153.05 4954.87,2153.03 ccw(c4954.87,1916.81) 4954.87,1680.59 4953.24,1680.93

## Other copper
Top Layer:
  region net +3.3: 5316,1581.5 5245,1652.5 5245,1838.5 5263,1856.5 5406,1856.5 5425,1837.5 5425,1652.5 5354,1581.5
Layer 1:
  region net +3.3: 5245,1652.5 5245,1838.5 5263,1856.5 5406,1856.5 5425,1837.5 5425,1652.5 5405,1632.5 5265,1632.5

## Silkscreen, mask and mechanical layers (free items; w line width, h text height)
Mechanical 1:
  lines w10: 4953.24,1680.93 5034.98,1680.93 ; 4954.87,1680.59 cw(c4954.87,1916.81) 4954.87,2153.03 ; 4955.82,2153.05 5037.56,2153.05 ; 5034.15,1680.7 cw(c5034.15,1601.96) 5112.89,1601.96 ; 5038.18,2152.77 ccw(c5038.18,2231.51) 5116.92,2231.51 ; 5113.04,1078.41 5113.04,1602.04 ; 5113.75,1077.28 ccw(c5192.49,1077.28) 5192.49,998.54 ; 5116.11,2759.91 cw(c5194.85,2759.91) 5194.85,2838.65 ; 5116.53,2231.87 5116.53,2755.49 ; 5195.7,1000 6337.44,1000 ; 5197.71,2838.66 6339.45,2838.66 ; 6339.61,1000.31 ccw(c6339.61,1079.05) 6418.35,1079.05 ; 6341.94,2839.06 cw(c6341.94,2760.32) 6420.68,2760.32 ; 6419.21,1078.82 6419.21,1602.44 ; 6420.55,1602.72 cw(c6499.29,1602.72) 6499.29,1681.46 ; 6421.1,2236.5 6421.1,2760.12 ; 6421.5,2236.83 ccw(c6500.24,2236.83) 6500.24,2158.09 ; 6500.93,2157.12 6582.66,2157.12 ; 6502.06,1681.59 6583.79,1681.59 ; 6585.18,1682.53 ccw(c6585.18,1918.75) 6585.18,2154.97
Mechanical 15:
  lines w10: 4718.98,1916.07 5131.09,1916.07 6393.66,1916.07 ; 4954.69,1679.22 4954.69,2152.26 ; 5769.14,999.28 5769.14,2836.38 ; 6396.28,1918.69 6821.29,1918.69 ; 6585.23,1682.64 6585.23,2155.29

## Dimensions
6337.44,1000 to 6339.45,2838.66 on Mechanical 15
4718.65,1916.81 to 6821.4,1918.75 on Mechanical 15
5115,975 to 6420,985 on Mechanical 15
6337.44,1000 to 6420,1679.31 on Mechanical 15

## Text inside footprints (layer, text, board x,y; h text height)
SW1: Top Overlay "ON" at 5406.91,2630.4 h60